# EAGLE board pasivizator (EAGLE 7.3.0)
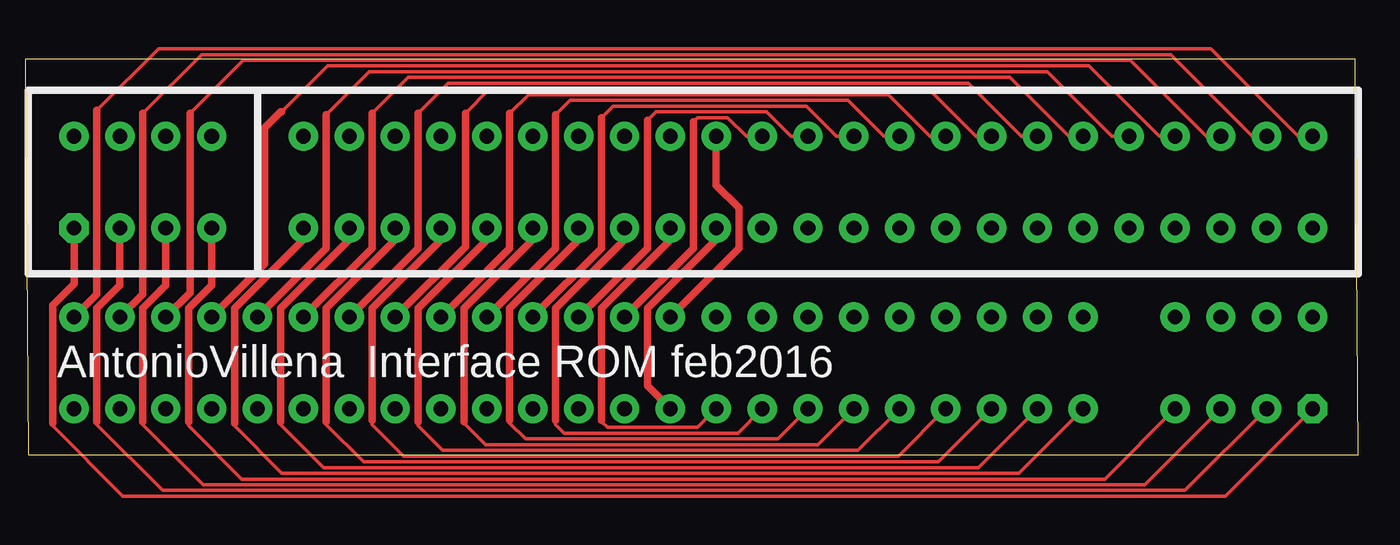
[diagram p0: board, top side]
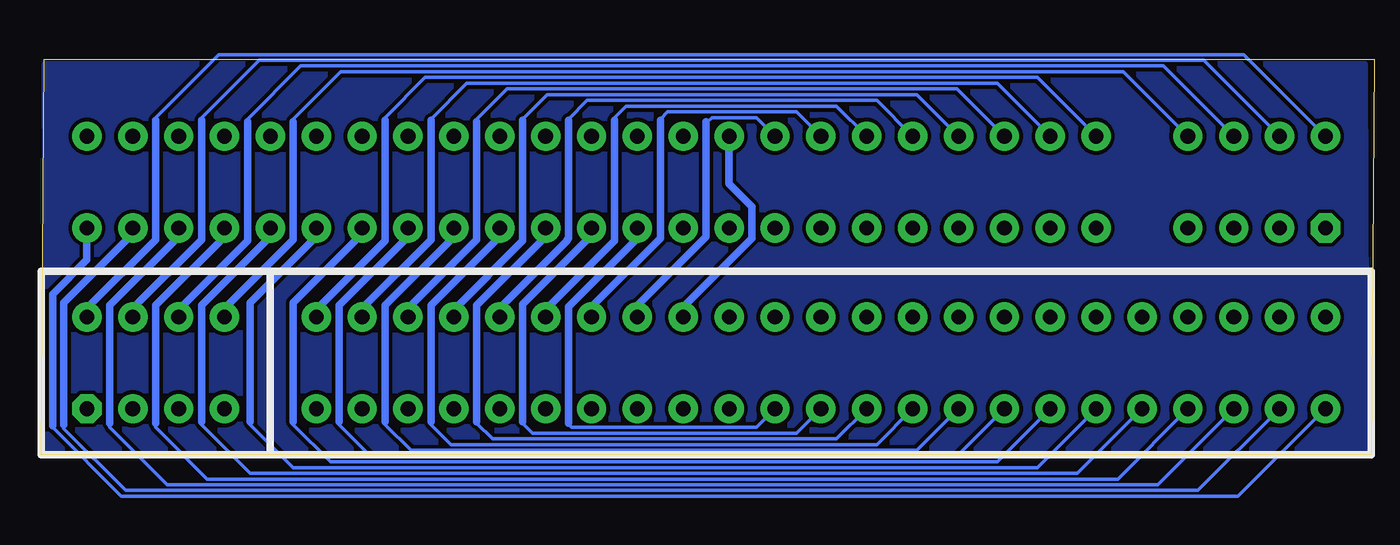
[diagram p1: board, bottom side, seen from below]

No outline drawn. Coordinates in mm, seen from the top.
Copper layers (1*16): Top 0.035mm / dielectric 1.5mm / Bottom 0.035mm
Design rules "default": minimum track width 10mil, minimum drill 24mil, track to track 8mil, track to pad 8mil, pad to pad 8mil, via to via 8mil, smd to smd 8mil, copper to edge 40mil, drill to drill 8mil, minimum pad ring 10mil, minimum via ring 8mil, stop-mask expansion 4mil, vias tented up to drill 0mil, thermal gap 10mil
Milling: 4 lines

## Footprints (pad centres in the part's own frame; a part is rotated, then mirrored left to right if it is on the bottom)
2X28_SPE = drill 0.813 pad 1.626 octagon: A1 0,-5.08 | drill 0.813 pad 1.626: A2 2.54,-5.08; A3 5.08,-5.08; A4 7.62,-5.08; A6 12.7,-5.08; A7 15.24,-5.08; A8 17.78,-5.08; A9 20.32,-5.08; A10 22.86,-5.08; A11 25.4,-5.08; A12 27.94,-5.08; A13 30.48,-5.08; A14 33.02,-5.08; A15 35.56,-5.08; A16 38.1,-5.08; A17 40.64,-5.08; A18 43.18,-5.08; A19 45.72,-5.08; A20 48.26,-5.08; A21 50.8,-5.08; A22 53.34,-5.08; A23 55.88,-5.08; A24 58.42,-5.08; A25 60.96,-5.08; A26 63.5,-5.08; A27 66.04,-5.08; A28 68.58,-5.08; B1 0,0; B2 2.54,0; B3 5.08,0; B4 7.62,0; B6 12.7,0; B7 15.24,0; B8 17.78,0; B9 20.32,0; B10 22.86,0; B11 25.4,0; B12 27.94,0; B13 30.48,0; B14 33.02,0; B15 35.56,0; B16 38.1,0; B17 40.64,0; B18 43.18,0; B19 45.72,0; B20 48.26,0; B21 50.8,0; B22 53.34,0; B23 55.88,0; B24 58.42,0; B25 60.96,0; B26 63.5,0; B27 66.04,0; B28 68.58,0

## Placement (x,y rotation side)
U$1  [2X28_SPE]  2.54,17.62 0 top
U$3  [2X28_SPE]  71.12,7.62 0 bottom

## Library data of the parts
U$1 U$3 = zx_edge

## Nets
N$1: U$1.B22 U$3.B22
N$2: U$1.B20 U$3.B20
N$3: U$1.B23 U$3.B23
N$4: U$1.A26 U$3.A26
N$5: U$1.A19 U$3.A19
N$6: U$1.B15 U$3.B15
N$7: U$1.B13 U$3.B13
N$8: U$1.B17 U$3.B17
N$9: U$1.A13 U$3.A13
N$10: U$1.B24 U$3.B24
N$11: U$1.B16 U$3.B16
N$12: U$1.B14 U$3.B14
N$13: U$1.B18 U$3.B18
N$14: U$1.A20 U$3.A20
N$15: U$1.B25 U$3.B25
N$16: U$1.A25 U$3.A25
N$17: U$1.B21 U$3.B21
N$18: U$1.B19 U$3.B19
N$19: U$1.A16 U$3.A16
N$20: U$1.A3 U$3.A3
N$21: U$1.A4 U$3.A4
N$22: U$1.A9 U$3.A9
N$23: U$1.A10 U$3.A10
N$24: U$1.A11 U$3.A11
N$25: U$1.A12 U$3.A12
N$26: U$1.A24 U$3.A24
N$27: U$1.A23 U$3.A23
N$28: U$1.A22 U$3.A22
N$29: U$1.A21 U$3.A21
N$30: U$1.B26 U$3.B26
N$31: U$1.A27 U$3.A27
N$32: U$1.B27 U$3.B27
N$33: U$1.A28 U$3.A28
N$34: U$1.A2 U$3.A2
N$35: U$1.B2 U$3.B2
N$36: U$1.A1 U$3.A1
N$37: U$1.B1 U$3.B1
N$38: U$1.A8 U$3.A8
N$39: U$1.B6 U$3.B6
N$40: U$1.B7 U$3.B7
N$41: U$1.B8 U$3.B8
N$42: U$1.B11 U$3.B11
N$43: U$1.B12 U$3.B12
N$44: U$1.B10 U$3.B10
N$45: U$1.B9 U$3.B9
N$46: U$1.B3 U$3.B3
N$47: U$1.A6 U$3.A6
N$48: U$1.A7 U$3.A7
N$49: U$1.A14 U$3.A14
N$50: U$1.B4 U$3.B4
N$51: U$1.B28 U$3.B28
N$52: U$1.A18 U$3.A18
N$53: U$1.A17 U$3.A17
N$54: U$1.A15 U$3.A15

## Tracks (layer width: path | path; a pad name or v marks a point on that pad's centre or on a via)
GND
  pour Bottom: 0.4,21.59 73.42,21.59 73.34,0.32 0.32,0.32
N$1
  Top 0.2: U$1.B22 55.01,17.62 52.07,20.56 23.26,20.56 21.59,18.89
  Top 0.406: U$3.B22 18.93,8.77 19.05,8.89 21.59,11.43 21.59,18.89
N$2
  Top 0.2: U$1.B20 49.93,17.62 47.62,19.92 27.7,19.92 26.67,18.89
  Top 0.406: U$3.B20 23.85,8.61 24.13,8.89 26.67,11.43 26.67,18.89
N$3
  Top 0.2: U$1.B23 57.63,17.62 54.37,20.88 21.03,20.88 19.05,18.89
  Top 0.406: 19.05,18.89 19.05,11.43 U$3.B23
N$4
  Bottom 0.2: 69.85,1.75 69.85,1.51 66.67,-1.67 11.83,-1.67 U$3.A26
  Bottom 0.406: U$1.A26 66.04,12.06 69.85,8.26 69.85,1.75
N$5
  Bottom 0.2: 52.07,1.83 52.07,1.67 50.96,0.56 27.38,0.56 U$3.A19
  Bottom 0.406: U$1.A19 48.26,12.06 52.07,8.26 52.07,1.83
N$6
  Top 0.406: U$1.B15 38.1,14.92 39.37,13.65 39.37,11.43 U$3.B15
N$7
  Bottom 0.2: 36.83,18.41 36.75,18.41 36.51,18.65 34.05,18.65 U$1.B13
  Bottom 0.406: U$3.B13 40.64,8.26 36.83,12.06 36.83,18.41
N$8
  Top 0.2: U$1.B17 42.23,17.62 40.88,18.97 34.77,18.97 34.29,18.49
  Top 0.406: U$3.B17 31.71,8.85 31.75,8.89 34.29,11.43 34.29,18.49
N$9
  Top 0.2: 29.21,1.91 29.21,1.67 29.69,1.19 39.29,1.19 U$3.A13
  Top 0.406: U$1.A13 33.02,11.91 29.21,8.1 29.21,1.91
N$10
  Top 0.2: U$1.B24 60.01,17.62 56.44,21.19 18.89,21.19 16.51,18.81
  Top 0.406: 16.51,18.81 16.51,11.43 U$3.B24
N$11
  Top 0.2: U$1.B16 39.77,17.62 38.73,18.65 37.07,18.65 36.83,18.41
  Top 0.406: 36.83,18.41 36.83,11.43 U$3.B16
N$12
  Bottom 0.406: U$3.B14 38.1,8.18 34.29,11.99 34.29,13.73 35.56,15 U$1.B14
N$13
  Top 0.2: U$1.B18 44.77,17.62 43.1,19.29 32.38,19.29 31.75,18.65
  Top 0.406: 31.75,18.65 31.75,11.43 U$3.B18
N$14
  Bottom 0.2: 54.61,1.83 54.61,1.67 53.18,0.24 25.16,0.24 U$3.A20
  Bottom 0.406: U$1.A20 50.8,12.06 54.61,8.26 54.61,1.83
N$15
  Top 0.2: U$1.B25 62.63,17.62 58.74,21.51 16.59,21.51 14.05,18.97
  Top 0.406: 14.05,18.97 13.97,18.97 13.1,18.1 13.1,10.56 U$3.B25
N$16
  Bottom 0.2: 67.31,1.75 67.31,1.51 64.45,-1.35 14.05,-1.35 U$3.A25
  Bottom 0.406: U$1.A25 63.5,12.06 67.31,8.26 67.31,1.75
N$17
  Top 0.2: U$1.B21 52.47,17.62 49.85,20.24 25.56,20.24 24.21,18.89
  Top 0.406: 24.21,18.89 24.21,11.51 U$3.B21
N$18
  Top 0.2: U$1.B19 47.39,17.62 45.4,19.61 30,19.61 29.21,18.81
  Top 0.406: 29.21,18.81 29.21,11.43 U$3.B19
N$19
  Bottom 0.2: 44.45,1.75 44.45,1.67 44.29,1.51 34.05,1.51 U$3.A16
  Bottom 0.406: U$1.A16 40.64,11.99 44.45,8.18 44.45,1.75
N$20
  Top 0.2: 6.35,1.83 6.35,1.67 9.68,-1.67 61.83,-1.67 U$3.A3
  Top 0.406: U$1.A3 7.62,9.37 6.35,8.1 6.35,1.83
N$21
  Top 0.2: 8.89,1.83 8.89,1.59 11.83,-1.35 59.61,-1.35 U$3.A4
  Top 0.406: U$1.A4 10.16,9.37 8.89,8.1 8.89,1.83
N$22
  Top 0.2: 19.05,1.91 19.05,1.67 20.8,-0.08 48.18,-0.08 U$3.A9
  Top 0.406: U$1.A9 22.86,11.91 19.05,8.1 19.05,1.91
N$23
  Top 0.2: 21.59,1.83 21.59,1.59 22.94,0.24 45.96,0.24 U$3.A10
  Top 0.406: U$1.A10 25.4,11.91 21.59,8.1 21.59,1.83
N$24
  Top 0.2: 24.13,1.83 24.13,1.75 25.32,0.56 43.74,0.56 U$3.A11
  Top 0.406: U$1.A11 27.94,11.91 24.13,8.1 24.13,1.83
N$25
  Top 0.2: 26.67,1.91 26.67,1.75 27.54,0.87 41.51,0.87 U$3.A12
  Top 0.406: U$1.A12 30.48,11.91 26.67,8.1 26.67,1.91
N$26
  Bottom 0.2: 64.77,1.83 64.77,1.67 62.07,-1.03 16.27,-1.03 U$3.A24
  Bottom 0.406: U$1.A24 60.96,12.06 64.77,8.26 64.77,1.83
N$27
  Bottom 0.2: 62.07,1.83 62.07,1.67 59.69,-0.71 18.49,-0.71 U$3.A23
  Bottom 0.406: U$1.A23 58.42,12.06 62.07,8.41 62.07,1.83
N$28
  Bottom 0.2: 59.69,1.83 59.69,1.67 57.63,-0.4 20.72,-0.4 U$3.A22
  Bottom 0.406: U$1.A22 55.88,12.22 59.69,8.41 59.69,1.83
N$29
  Bottom 0.2: 57.15,1.83 57.15,1.67 55.4,-0.08 22.94,-0.08 U$3.A21
  Bottom 0.406: U$1.A21 53.34,12.06 57.15,8.26 57.15,1.83
N$30
  Top 0.2: U$1.B26 65.25,17.62 61.04,21.83 11.91,21.83 8.97,18.89
  Top 0.406: 8.97,18.89 8.97,8.97 U$3.B26
N$31
  Bottom 0.2: 72.39,1.67 72.39,1.43 68.98,-1.98 9.6,-1.98 U$3.A27
  Bottom 0.406: U$1.A27 68.58,12.22 72.39,8.41 72.39,1.67
N$32
  Top 0.2: U$1.B27 67.79,17.62 63.26,22.15 9.6,22.15 6.35,18.89
  Top 0.406: 6.35,18.89 6.35,8.89 U$3.B27
N$33
  Bottom 0.2: 73.03,1.59 73.03,1.51 69.22,-2.3 7.38,-2.3 U$3.A28
  Bottom 0.406: U$1.A28 71.12,10.79 73.03,8.89 73.03,1.59
N$34
  Top 0.2: 3.81,1.83 3.81,1.67 7.46,-1.98 64.06,-1.98 U$3.A2
  Top 0.406: U$1.A2 5.08,9.37 3.81,8.1 3.81,1.83
N$35
  Bottom 0.2: 64.77,18.49 64.77,18.65 61.59,21.83 9.29,21.83 U$1.B2
  Bottom 0.406: U$3.B2 68.58,8.1 64.77,11.91 64.77,18.49
N$36
  Top 0.2: 1.35,1.75 1.35,1.59 5.24,-2.3 66.28,-2.3 U$3.A1
  Top 0.406: U$1.A1 2.54,9.45 1.35,8.26 1.35,1.75
N$37
  Bottom 0.2: 67.31,18.49 67.31,18.65 63.82,22.15 7.06,22.15 U$1.B1
  Bottom 0.406: U$3.B1 71.12,8.1 67.31,11.91 67.31,18.49
N$38
  Top 0.2: 16.51,1.83 16.51,1.67 18.57,-0.4 50.4,-0.4 U$3.A8
  Top 0.406: U$1.A8 20.32,11.91 16.51,8.1 16.51,1.83
N$39
  Bottom 0.2: 54.61,18.49 54.61,18.65 52.39,20.88 18.49,20.88 U$1.B6
  Bottom 0.406: U$3.B6 58.42,8.02 54.61,11.83 54.61,18.49
N$40
  Bottom 0.2: 52.07,18.49 52.07,18.57 50.09,20.56 20.72,20.56 U$1.B7
  Bottom 0.406: U$3.B7 55.88,8.1 52.07,11.91 52.07,18.49
N$41
  Bottom 0.2: 49.53,18.41 49.53,18.57 47.86,20.24 22.94,20.24 U$1.B8
  Bottom 0.406: U$3.B8 53.34,8.1 49.53,11.91 49.53,18.41
N$42
  Bottom 0.2: 41.91,18.49 41.91,18.65 41.27,19.29 29.61,19.29 U$1.B11
  Bottom 0.406: U$3.B11 45.72,8.02 41.91,11.83 41.91,18.49
N$43
  Bottom 0.2: 39.37,18.49 39.37,18.57 38.97,18.97 31.83,18.97 U$1.B12
  Bottom 0.406: U$3.B12 43.18,8.18 39.37,11.99 39.37,18.49
N$44
  Bottom 0.2: 44.45,18.49 44.45,18.57 43.42,19.61 27.38,19.61 U$1.B10
  Bottom 0.406: U$3.B10 48.26,8.1 44.53,11.83 44.53,11.91 44.45,11.99 44.45,18.49
N$45
  Bottom 0.2: 46.99,18.49 46.99,18.57 45.64,19.92 25.16,19.92 U$1.B9
  Bottom 0.406: U$3.B9 50.8,8.02 46.99,11.83 46.99,18.49
N$46
  Bottom 0.2: 62.23,18.41 62.23,18.57 59.29,21.51 11.51,21.51 U$1.B3
  Bottom 0.406: U$3.B3 66.04,8.02 62.23,11.83 62.23,18.41
N$47
  Top 0.2: 11.43,1.75 11.43,1.59 14.05,-1.03 54.85,-1.03 U$3.A6
  Top 0.406: U$1.A6 15.24,11.91 11.43,8.1 11.43,1.75
N$48
  Top 0.2: 13.97,1.83 13.97,1.67 16.35,-0.71 52.63,-0.71 U$3.A7
  Top 0.406: U$1.A7 17.78,11.91 13.97,8.1 13.97,1.83
N$49
  Top 0.2: 31.75,1.91 31.75,1.83 32.07,1.51 37.07,1.51 U$3.A14
  Top 0.406: U$1.A14 35.56,11.91 31.75,8.1 31.75,1.91
N$50
  Bottom 0.2: 59.69,18.41 59.69,18.57 57.07,21.19 13.73,21.19 U$1.B4
  Bottom 0.406: U$3.B4 63.5,8.1 59.69,11.91 59.69,18.41
N$51
  Top 0.2: U$1.B28 70.33,17.62 65.48,22.46 7.22,22.46 3.81,19.05
  Top 0.406: 3.81,19.05 3.81,8.89 U$3.B28
N$52
  Bottom 0.2: 49.53,1.83 49.53,1.75 48.66,0.87 29.61,0.87 U$3.A18
  Bottom 0.406: U$1.A18 45.72,12.06 49.53,8.26 49.53,1.83
N$53
  Bottom 0.2: 46.99,1.83 46.99,1.75 46.43,1.19 31.83,1.19 U$3.A17
  Bottom 0.406: U$1.A17 43.18,12.14 46.99,8.33 46.99,1.83
N$54
  Top 0.406: U$1.A15 38.1,11.91 34.29,8.1 34.29,3.81 U$3.A15

## Text on the board
tPlace: AntonioVillena | Interface ROM feb2016